# EAGLE board PCB (EAGLE 9.7.0)
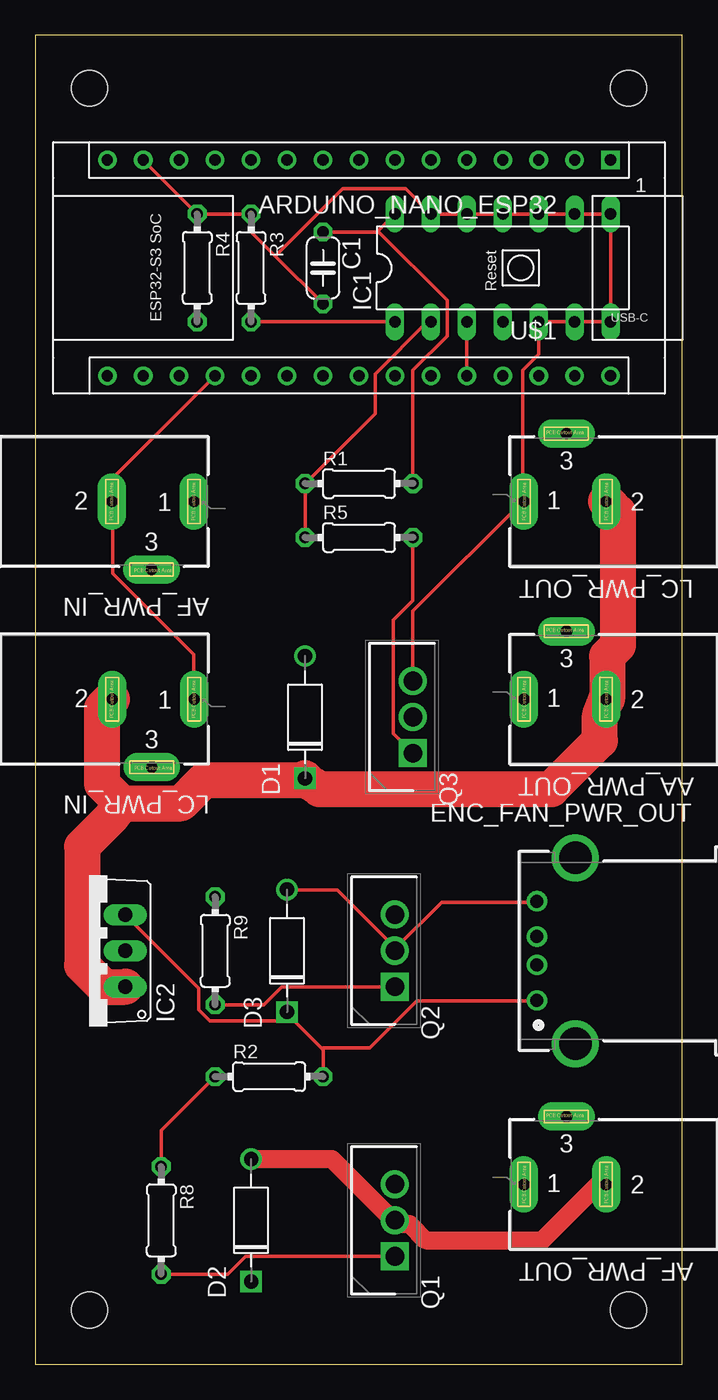
[diagram p0: board, top side]
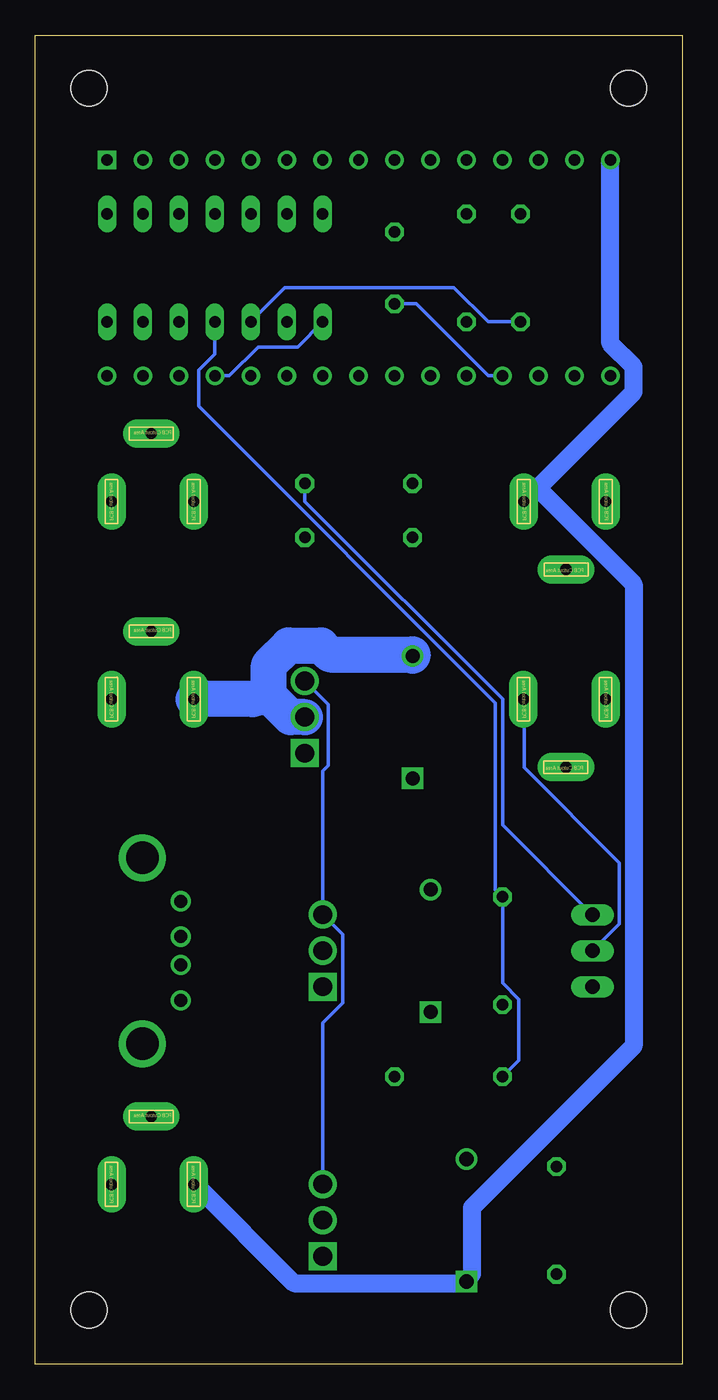
[diagram p1: board, bottom side, seen from below]

Size 45.7 x 93.9 mm. Coordinates in mm from the lower left corner, seen from the top.
Outline: 0,93.9 0,0 45.7,0 45.7,93.9 0,93.9
Copper layers (1*16): Top / Bottom
Stack-up Default Layer Stack: Top User Defined 0.035mm / Dielectric-1 User Defined 1.5mm / Bottom User Defined 0.035mm
Design rules: minimum copper width class=2 100mil, minimum copper width class=4 50mil, minimum copper width class=3 10mil, minimum copper width class=0 10mil, minimum copper width 6mil, minimum drill size class=2 100mil, minimum drill size class=4 50mil, minimum drill size 0.35mm, minimum drill size class=3 10mil, minimum drill size class=0 10mil, copper clearance class=2 to class=2 110mil, copper clearance class=4 to class=4 50mil, copper clearance class=2 to class=1 10mil, copper clearance class=2 to class=0 10mil, copper clearance class=3 to class=1 10mil, copper clearance class=3 to class=2 10mil, copper clearance class=3 to class=3 10mil, copper clearance class=3 to class=0 10mil, copper clearance class=4 to class=1 10mil, copper clearance class=4 to class=2 10mil, copper clearance class=4 to class=3 10mil, copper clearance class=4 to class=0 10mil, copper clearance class=0 to class=0 10mil, copper clearance wire_polygon to wire_polygon 6mil, copper clearance wire_polygon to pad_smd 6mil, copper clearance wire_polygon to via 6mil, copper clearance pad_smd to pad_smd 6mil, copper clearance pad_smd to via 6mil, copper clearance via to via 6mil, copper clearance smd to pad (same net) 6mil, copper clearance smd to via (same net) 6mil, copper clearance smd to smd (same net) 6mil, dimension clearance 40mil, restrict clearance 0mil, drill distance 6mil, keepout clearance 0mil
Net classes: 0 default: width 0.254 mm, drill 0.254 mm, clearance 0.254 mm; 2 24V: width 2.54 mm, drill 2.54 mm, clearance 0.254 mm to class 0, clearance 0.254 mm to class 1, clearance 2.794 mm; 3 5V: width 0.254 mm, drill 0.254 mm, clearance 0.254 mm to class 0, clearance 0.254 mm to class 1, clearance 0.254 mm to class 2, clearance 0.254 mm; 4 12V: width 1.27 mm, drill 1.27 mm, clearance 0.254 mm to class 0, clearance 0.254 mm to class 1, clearance 0.254 mm to class 2, clearance 0.254 mm to class 3, clearance 1.27 mm
Holes 2.54 mm at 3.81,90.17 41.91,90.17 41.91,3.81 3.81,3.81

## Footprints (pad centres in the part's own frame; a part is rotated, then mirrored left to right if it is on the bottom)
694106301002 = drill 0.8 pad 2 long: 1 5.8,0; 2 0,0; 3 2.8,-4.8
C050-024X044 = drill 0.813 octagon: 1 -2.54,0; 2 2.54,0
DO-41 = drill 1: A 4.325,0 | drill 1 square: C -4.325,0
614004190021 = drill 0.92: 1 -3.5,5.935; 2 -1,5.935; 3 1,5.935; 4 3.5,5.935 | drill 2.3: S1 -6.57,3.225; S2 6.57,3.225
DIL14 = drill 0.813 long: 1 -7.62,-3.81; 2 -5.08,-3.81; 3 -2.54,-3.81; 4 0,-3.81; 5 2.54,-3.81; 6 5.08,-3.81; 7 7.62,-3.81; 8 7.62,3.81; 9 5.08,3.81; 10 2.54,3.81; 11 0,3.81; 12 -2.54,3.81; 13 -5.08,3.81; 14 -7.62,3.81
TO220V = drill 1.016 long: 1 -2.54,-2.54; 2 0,-2.54; 3 2.54,-2.54
TO255P460X1020X2008-3P = drill 1.32 pad 1.98 square: 1 0,0 | drill 1.32 pad 1.98: 2 2.55,0; 3 5.1,0
0204/7 = drill 0.813 octagon: 1 -3.81,0; 2 3.81,0
ARDUINO_NANO_ESP32_ON_HEADERS = drill 0.8 square: 1 -20.32,-7.62 | drill 0.8: 2 -17.78,-7.62; 3 -15.24,-7.62; 4 -12.7,-7.62; 5 -10.16,-7.62; 6 -7.62,-7.62; 7 -5.08,-7.62; 8 -2.54,-7.62; 9 0,-7.62; 10 2.54,-7.62; 11 5.08,-7.62; 12 7.62,-7.62; 13 10.16,-7.62; 14 12.7,-7.62; 15 15.24,-7.62; 16 15.24,7.62; 17 12.7,7.62; 18 10.16,7.62; 19 7.62,7.62; 20 5.08,7.62; 21 2.54,7.62; 22 0,7.62; 23 -2.54,7.62; 24 -5.08,7.62; 25 -7.62,7.62; 26 -10.16,7.62; 27 -12.7,7.62; 28 -15.24,7.62; 29 -17.78,7.62; 30 -20.32,7.62

## Placement (x,y rotation side)
AA_PWR_OUT  694106301002  [694106301002]  40.32,46.99 180 top
AF_PWR_IN  694106301002  [694106301002]  5.4,60.96 0 top
AF_PWR_OUT  694106301002  [694106301002]  40.32,12.7 180 top
C1  100n  [C050-024X044]  20.32,77.47 270 top
D1  1N4004  [DO-41]  19.05,45.72 90 top
D2  1N4004  [DO-41]  15.24,10.16 90 top
D3  1N4004  [DO-41]  17.78,29.21 90 top
ENC_FAN_PWR_OUT  614004190021  [614004190021]  41.37,29.21 90 top
IC1  7407N  [DIL14]  33.02,77.47 0 top
IC2  LM7805_TO220V  [TO220V]  3.81,29.21 90 top
LC_PWR_IN  694106301002  [694106301002]  5.42,46.99 0 top
LC_PWR_OUT  694106301002  [694106301002]  40.32,60.96 180 top
Q1  STP130N6F7  [TO255P460X1020X2008-3P]  25.4,7.62 90 top
Q2  STP130N6F7  [TO255P460X1020X2008-3P]  25.4,26.67 90 top
Q3  STP130N6F7  [TO255P460X1020X2008-3P]  26.67,43.18 90 top
R1  10k  [0204/7]  22.86,62.23 0 top
R2  10k  [0204/7]  16.51,20.32 0 top
R3  1k  [0204/7]  15.24,77.47 270 top
R4  1k  [0204/7]  11.43,77.47 270 top
R5  1K  [0204/7]  22.86,58.42 0 top
R8  1K  [0204/7]  8.89,10.16 270 top
R9  1K  [0204/7]  12.7,29.21 270 top
U$1  ARDUINO_NANO_ESP32  [ARDUINO_NANO_ESP32_ON_HEADERS]  20.32,77.47 180 top

## Library data of the parts
AA_PWR_OUT AF_PWR_IN AF_PWR_OUT LC_PWR_IN LC_PWR_OUT = Wurth_Connectors_WR-DC; DATASHEET-URL: https://www.we-online.com/catalog/datasheet/694106301002.pdf; IR: 5A; MOUNT: THT; PART-NUMBER: 694106301002; TYPE: Right Angled; WORKING-VOLTAGE: 30V(AC)
C1 IC1 R1-R5 R8 R9 U$1 = MyComponentsFusion
D1-D3 = MyComponentsFusion; CREATED_BY: PCBLayout.com; DIGIKEY_PART_NUMBER: 1N4004MSCT-ND; MANUFACTURER: Micro Commercial Co; MPN: 1N4004; PACKAGE: DO-41
ENC_FAN_PWR_OUT = Wurth_Connectors_WR-USB; APPLICATION: USB 2.0; DATASHEET-URL: https://www.we-online.com/redexpert/spec/614004190021?ae; GERDER: Receptacle; INTERFACE-TYPE: Type A; IR: 3.0A; MOUNT: THT; PACKAGING: Tray; PART-NUMBER: 614004190021; PINS: 4; TYPE: Horizontal; WORKING-VOLTAGE: 30V(AC)
IC2 = IC_Power-Management; CATEGORY: IC_Linear; DESCRIPTION: 5V Voltage Regulator; MANUFACTURER: Generic; MPN: Generic; SERIES: LM7805; SUB-CATEGORY: Voltage Regulator; TYPE: 5V
Q1-Q3 = SamacSys_Parts; ARROW_PART_NUMBER: STP130N6F7; ARROW_PRICE-STOCK: https://www.arrow.com/en/products/stp130n6f7/stmicroelectronics?region=nac; DESCRIPTION: N-channel 60 V, 4.2 mOhm typ., 80 A STripFET F7 Power MOSFET in TO-220 package; HEIGHT: 4.6mm; MANUFACTURER_NAME: STMicroelectronics; MANUFACTURER_PART_NUMBER: STP130N6F7; MOUSER_PART_NUMBER: 511-STP130N6F7; MOUSER_PRICE-STOCK: https://www.mouser.co.uk/ProductDetail/STMicroelectronics/STP130N6F7?qs=bKenfurwlsnAlTA32qCHLw%3D%3D

## Nets
+5V [5V]: C1.1 D3.C ENC_FAN_PWR_OUT.1 IC1.14 IC2.3 R1.2 R2.2
+12V [12V]: AF_PWR_IN.1 AF_PWR_OUT.1 D2.C U$1.15
+24V [24V]: AA_PWR_OUT.2 D1.C IC2.1 LC_PWR_IN.2 LC_PWR_OUT.2
AA_CTL: IC1.1 R3.2 U$1.27
AF_CTL: IC1.3 R4.2 U$1.26
GND: AF_PWR_IN.2 C1.2 IC1.5 IC1.6 IC1.7 IC1.8 IC1.9 IC1.10 IC1.11 IC1.12 IC1.13 IC2.2 LC_PWR_IN.1 LC_PWR_OUT.1 Q1.3 Q2.3 Q3.3 R3.1 R4.1 U$1.14 U$1.19
N$1 [12V]: AF_PWR_OUT.2 D2.A Q1.2
N$2: Q2.1 R9.2
N$3: IC1.2 R1.1 R5.1
N$4: Q1.1 R8.2
N$5: Q3.1 R5.2
N$8 [5V]: D3.A ENC_FAN_PWR_OUT.4 Q2.2
N$9: IC1.4 R2.1 R8.1 R9.1
N$10 [24V]: AA_PWR_OUT.1 D1.A Q3.2

## Tracks (layer width: path | path; a pad name or v marks a point on that pad's centre or on a via)
+5V
  Top 0.254: C1.1 24.13,80.01 24.19,80.07 | IC1.14 24.19,80.07 | R1.2 26.67,70.23 29.08,72.64 29.08,75.18 24.19,80.07 | R2.2 20.32,22.23 20.26,22.29 | 20.26,22.29 17.78,24.77 D3.C 17.78,24.64 17.4,24.26 12.32,24.26 11.56,25.02 11.56,26.54 IC2.3 | ENC_FAN_PWR_OUT.1 35.43,25.65 26.92,25.65 23.62,22.35 20.32,22.35 20.26,22.29
  Bottom 0.254: R1.2 26.67,60.96 12.7,46.99 12.7,38.1 IC2.3
+12V
  Bottom 1.27: AF_PWR_OUT.1 34.42,12.7 27.43,5.72 15.24,5.72 D2.C 14.86,6.35 14.86,11.05 3.43,22.48 3.43,55.12 10.22,61.91 | U$1.15 5.08,72.14 3.43,70.48 3.43,68.71 10.22,61.91 | 10.22,61.91 11.18,60.96 AF_PWR_IN.1
+24V
  Top 2.54: LC_PWR_OUT.2 40.39,60.96 41.15,60.2 41.15,50.8 40.39,50.04 40.39,46.99 AA_PWR_OUT.2 39.88,45.85 39.88,44.07 36.45,40.64 20.07,40.64 19.05,41.27 | 19.05,41.27 11.94,41.27 10.29,39.62 6.1,39.62 | 6.1,39.62 4.7,41.02 4.7,46.36 5.33,46.99 LC_PWR_IN.2 | 19.05,41.27 D1.C | IC2.1 4.83,26.67 3.3,28.19 3.3,36.58 5.33,38.61 6.1,39.62
AA_CTL
  Top 0.254: IC1.1 R3.2
  Bottom 0.254: U$1.27 32,69.85 29.97,71.88 27.18,71.88 IC1.1
AF_CTL
  Top 0.254: IC1.3 U$1.26
  Bottom 0.254: R4.2 13.72,73.66 16.13,76.07 28.07,76.07 IC1.3
GND
  Top 0.254: U$1.14 R4.1 R3.1 15.24,80.01 16.95,78.29 | 5.46,60.96 5.46,62.61 U$1.19 | C1.2 16.95,78.29 | 5.46,60.96 5.46,55.88 11.18,50.16 11.18,46.99 LC_PWR_IN.1 | 5.46,60.96 AF_PWR_IN.2 | Q3.3 26.67,53.21 34.42,60.96 | 34.42,60.96 34.42,70.23 35.56,71.37 IC1.5 IC1.6 IC1.7 IC1.8 IC1.9 IC1.10 IC1.11 IC1.12 IC1.13 26.16,83.06 21.72,83.06 16.95,78.29 | 34.42,60.96 LC_PWR_OUT.1
  Bottom 0.254: IC2.2 4.45,31.12 4.45,35.43 11.18,42.16 11.18,46.99 LC_PWR_IN.1 | U$1.19 13.72,69.85 18.8,74.93 C1.2 | Q1.3 25.4,24.13 24,25.53 24,30.35 25.4,31.75 Q2.3 25.4,41.91 25.02,42.29 25.02,46.61 26.67,48.26 Q3.3
N$1
  Top 1.27: D2.A 20.95,14.48 25.15,10.29 25.4,10.29 Q1.2 25.91,9.91 26.42,9.91 27.56,8.76 35.81,8.76 39.75,12.7 AF_PWR_OUT.2
N$2
  Top 0.254: R9.2 16.13,25.4 17.4,26.67 Q2.1
N$3
  Top 0.254: R5.1 R1.1 24,67.18 24,69.98 27.69,73.66 IC1.2
N$4
  Top 0.254: R8.2 13.59,6.35 14.86,7.62 Q1.1
N$5
  Top 0.254: R5.2 26.67,53.98 25.27,52.58 25.27,44.58 Q3.1
N$8
  Top 0.254: ENC_FAN_PWR_OUT.4 35.43,32.64 28.7,32.64 25.4,29.34 Q2.2 25.4,29.46 21.34,33.53 17.78,33.53 D3.A
N$9
  Top 0.254: R8.1 8.89,16.51 R2.1
  Bottom 0.254: R2.1 11.56,21.46 11.56,25.78 12.7,26.92 R9.1 13.21,33.53 13.21,46.74 34.16,67.69 34.16,70.23 33.02,71.37 IC1.4
N$10
  Bottom 2.54: 29.21,47.24 29.21,49.4 27.81,50.8 25.53,50.8 24.89,50.16 19.05,50.16 D1.A | 29.21,47.24 27.69,45.72 Q3.2 | AA_PWR_OUT.1 30.35,46.99 29.21,47.24